# Altium PCB 100068622-001_Rev1.PcbDoc (part 1 of 2)
Units mm, origin at the board's own origin, x right, y up, seen from the top; angles counter-clockwise.
Board outline 61.34 x 21.34 mm, 4 copper layers (F.Cu, In1.Cu, In2.Cu, B.Cu); 96 components, 54 nets, 231 pads, 172 vias.
Unrouted connection lines stored in the file: 5.
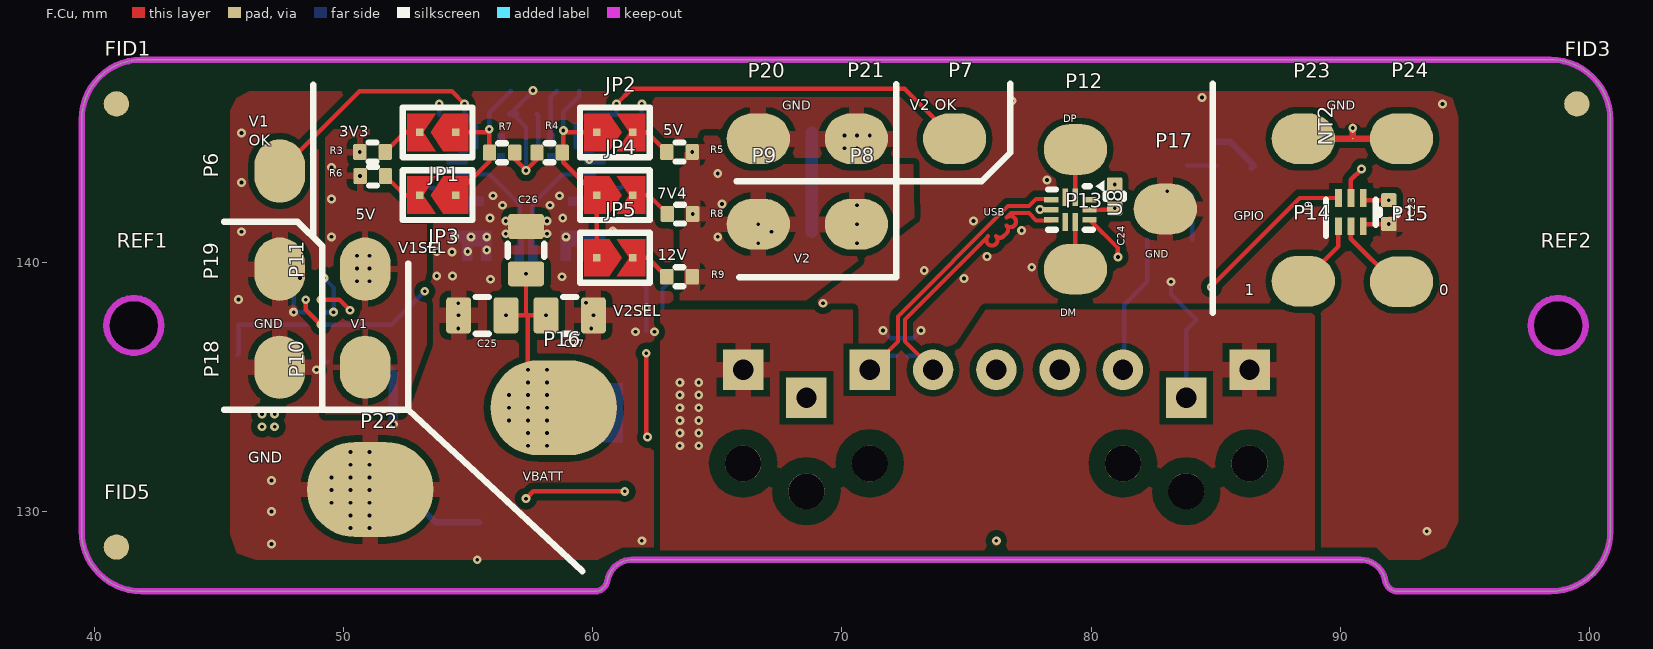
[diagram p0: F.Cu view]
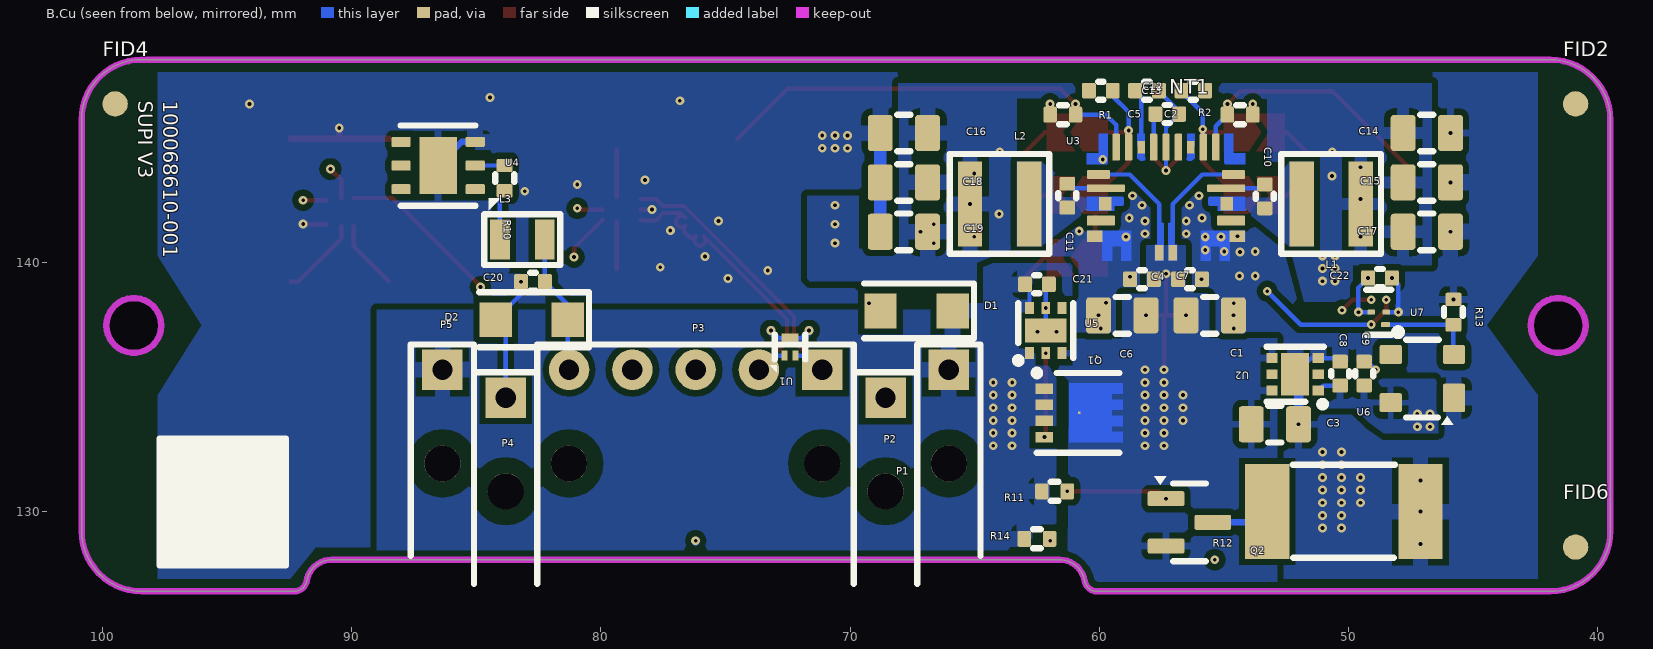
[diagram p1: B.Cu view, seen from below]
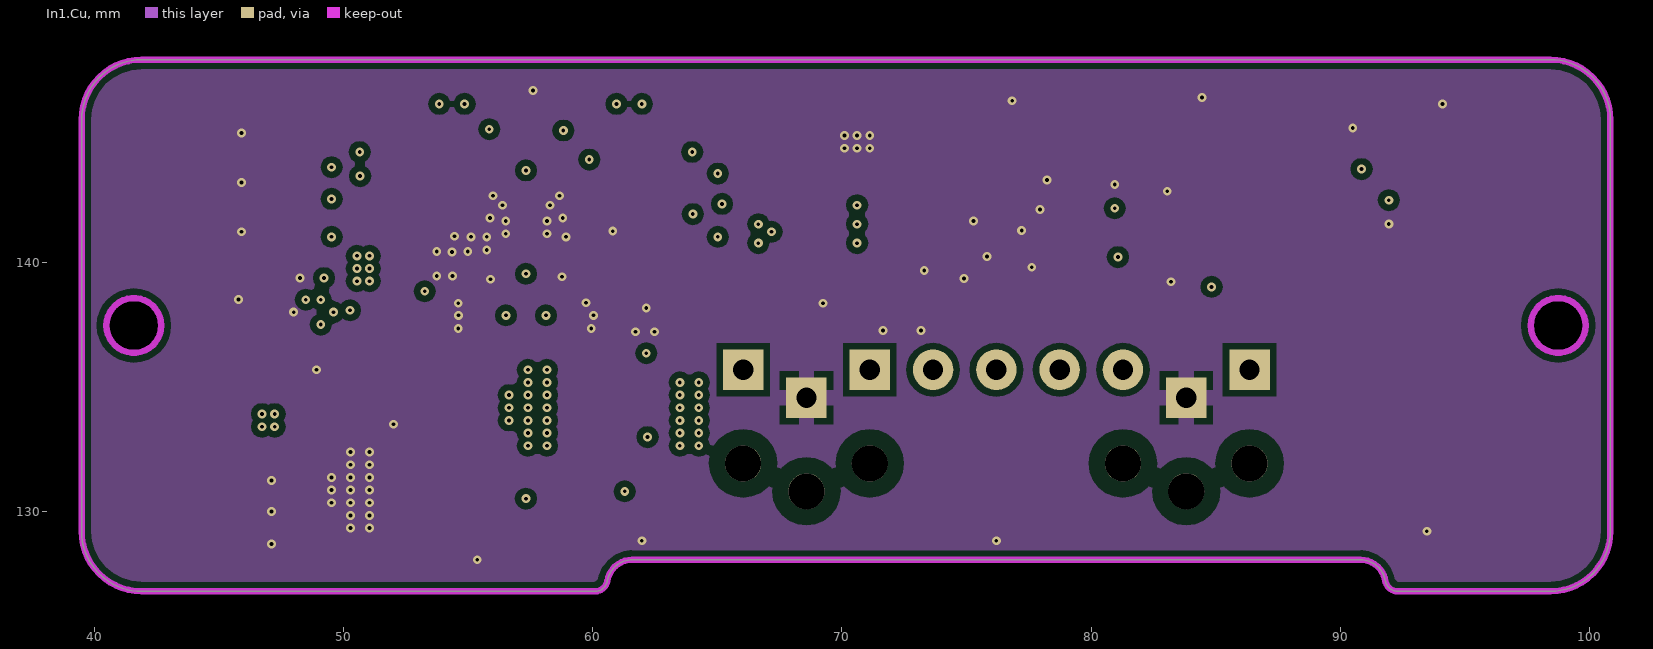
[diagram p2: In1.Cu]
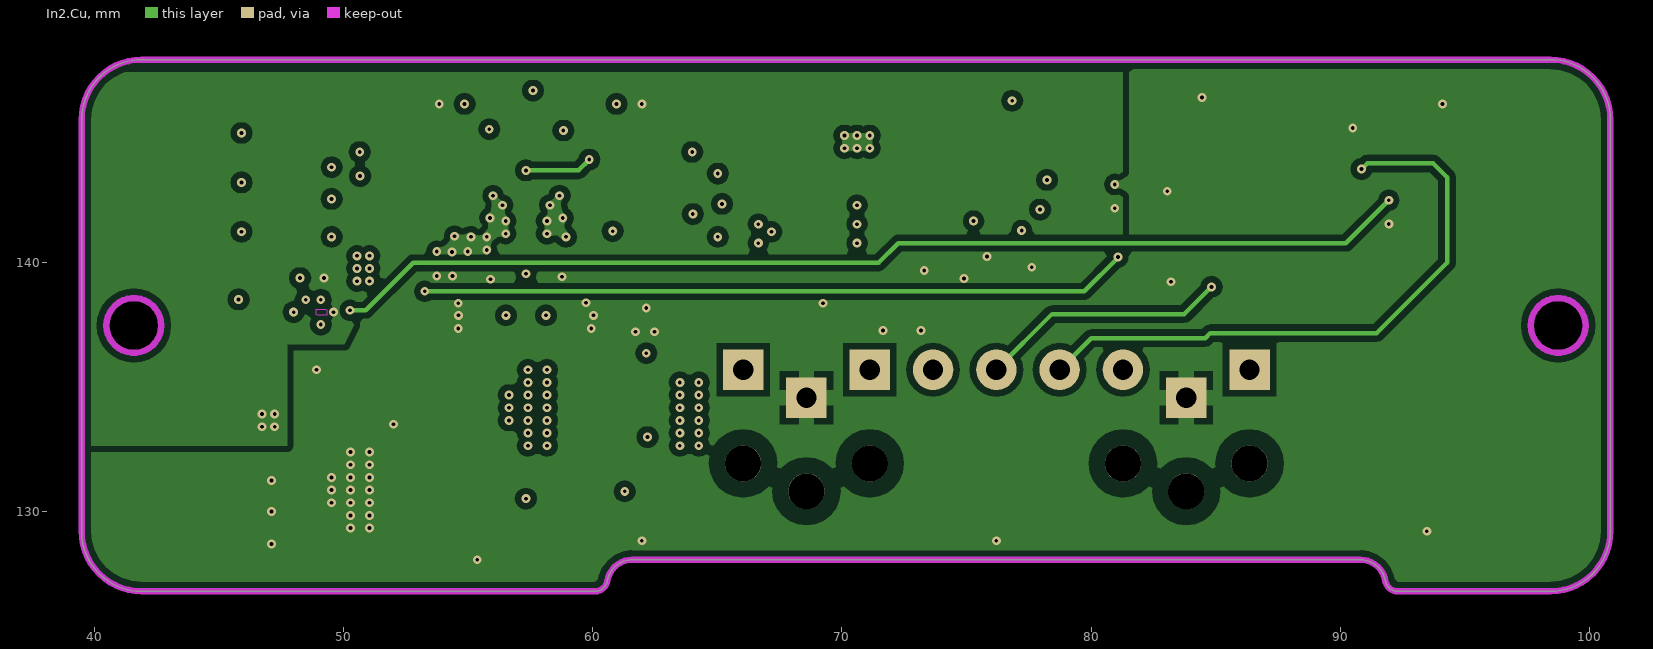
[diagram p3: In2.Cu]

## Layer stack, top to bottom
F.Mask: solder mask 0.0102, Solder Resist, Dk 3.5
F.Cu: signal copper 0.0356
Dielectric 1: dielectric 0.32, FR-4, Dk 4.8
In1.Cu: signal copper 0.0356
Dielectric2: dielectric 0.32, FR-4, Dk 4.8
In2.Cu: signal copper 0.0356
Dielectric3: dielectric 0.32, FR-4, Dk 4.8
B.Cu: signal copper 0.0356
B.Mask: solder mask 0.0102, Solder Resist, Dk 3.5

## Board outline
91.807,127.22 ccw(c92.308,127.305) 92.308,126.797 98.43,126.797 ccw(c98.425,129.21) 100.838,129.21 100.838,145.72 ccw(c98.425,145.72) 98.425,148.133 41.91,148.133 ccw(c41.91,145.72) 39.497,145.72 39.497,129.21 ccw(c41.91,129.21) 41.91,126.797 60.097,126.797 ccw(c60.092,127.305) 60.593,127.22 cw(c61.595,127.051) 60.715,127.559 cw(c61.595,127.051) 61.595,128.067 90.805,128.067 cw(c90.805,127.051) 91.685,127.559 cw(c90.805,127.051) 91.807,127.22
cut-out: 42.702,137.465 42.664,137.752 42.553,138.02 42.377,138.249 42.147,138.426 41.88,138.536 41.593,138.574 41.305,138.536 41.038,138.426 40.808,138.249 40.632,138.02 40.521,137.752 40.483,137.465 40.521,137.178 40.632,136.91 40.808,136.68 41.038,136.504 41.305,136.393 41.593,136.355 41.88,136.393 42.147,136.504 42.377,136.68 42.553,136.91 42.664,137.178 42.702,137.465
cut-out: 99.852,137.465 99.814,137.752 99.703,138.02 99.527,138.249 99.297,138.426 99.03,138.536 98.742,138.574 98.455,138.536 98.188,138.426 97.958,138.249 97.782,138.02 97.671,137.752 97.633,137.465 97.671,137.178 97.782,136.91 97.958,136.68 98.188,136.504 98.455,136.393 98.742,136.355 99.03,136.393 99.297,136.504 99.527,136.68 99.703,136.91 99.814,137.178 99.852,137.465

## Design rules (kind name [scope] priority, off if disabled: settings)
Clearance "Clearence 0.635_PadClass" [InPadClass('Pad Class Clearance 0.635')] p1: gap=0.635 ignorepadtopadclearanceinfootprint=FALSE
Clearance "Clearence 0.254_Polygon" [InNamedPolygon('F.Cu-/Block Diagram/VOUT2') OR InNamedPolygon('F.Cu-/Block Diagram/VOUT1') OR InNamedPolygon('F.Cu-GND') OR InNamedPolygon('F.Cu-GND-1') OR InNamedPolygon('F.Cu-/Block Diagram/VBATT') OR InNamedPolygon('In1.Cu-GND') OR InNamedPolygon('In2.Cu-GND') OR InNamedPolygon('In2.Cu-/Block Diagram/Power Supplies/P3V3_AUX') OR InNamedPolygon('B.Cu-Net-(U3-LX1)') OR InNamedPolygon('B.Cu-VBATT_PROT') OR InNamedPolygon('B.Cu-/Block Diagram/VBATT') OR InNamedPolygon('B.Cu-/Block Diagram/VOUT2') OR InNamedPolygon('B.Cu-/Block Diagram/Power Supplies/P3V3_AUX') OR InNamedPolygon('B.Cu-/Block Diagram/VOUT1') OR InNamedPolygon('B.Cu-GND') OR InNamedPolygon('B.Cu-Net-(U3-LX2)')] p2: gap=0.254 ignorepadtopadclearanceinfootprint=FALSE
Clearance "Clearence 0.254_PadClass" [InPadClass('Pad Class Clearance 0.254')] p3: gap=0.254 ignorepadtopadclearanceinfootprint=FALSE
Clearance "Clearence 0.1778_PadClass" [InPadClass('Pad Class Clearance 0.1778')] p4: gap=0.178 ignorepadtopadclearanceinfootprint=FALSE
Clearance "Clearence 0.1524_PadClass" [InPadClass('Pad Class Clearance 0.1524')] p5: gap=0.152 ignorepadtopadclearanceinfootprint=FALSE
Clearance "Clearence 0.14_PadClass" [InPadClass('Pad Class Clearance 0.14')] p6: gap=0.14 ignorepadtopadclearanceinfootprint=FALSE
Clearance "Clearence 0.0254_PadClass" [InPadClass('Pad Class Clearance 0.0254')] p7: gap=0.025 ignorepadtopadclearanceinfootprint=FALSE
MinimumSolderMaskSliver [All] p1: minsoldermaskwidth=0
PolygonConnect Polygon_B.Cu-Net-(U3-LX2)_ConnectDirect [IsNamedPolygon('B.Cu-Net-(U3-LX2)')] p1: connectstyle=Direct reliefconductorwidth=0.254 reliefentries=4 polygonreliefangle="90 Angle" airgapwidth=0.254
PolygonConnect Polygon_B.Cu-GND_ConnectDirect [IsNamedPolygon('B.Cu-GND') vs IsVia] p2: connectstyle=Direct reliefconductorwidth=0.254 reliefentries=4 polygonreliefangle="90 Angle" airgapwidth=0.254
PolygonConnect Polygon_B.Cu-GND_ConnectRelief45 [IsNamedPolygon('B.Cu-GND') vs (IsThruPin or IsSMTPin) and (PadShape_AllLayers = 'Round')] p3: connectstyle=Relief reliefconductorwidth=0.635 reliefentries=4 polygonreliefangle="45 Angle" airgapwidth=0.254
PolygonConnect Polygon_B.Cu-GND_ConnectRelief90 [IsNamedPolygon('B.Cu-GND') vs (IsThruPin or IsSMTPin) and (PadShape_AllLayers <> 'Round')] p4: connectstyle=Relief reliefconductorwidth=0.635 reliefentries=4 polygonreliefangle="90 Angle" airgapwidth=0.254
PolygonConnect "Polygon_B.Cu-/Block Diagram/VOUT1_ConnectDirect" [IsNamedPolygon('B.Cu-/Block Diagram/VOUT1') vs IsVia] p5: connectstyle=Direct reliefconductorwidth=0.254 reliefentries=4 polygonreliefangle="90 Angle" airgapwidth=0.254
PolygonConnect "Polygon_B.Cu-/Block Diagram/VOUT1_ConnectRelief45" [IsNamedPolygon('B.Cu-/Block Diagram/VOUT1') vs (IsThruPin or IsSMTPin) and (PadShape_AllLayers = 'Round')] p6: connectstyle=Relief reliefconductorwidth=0.508 reliefentries=4 polygonreliefangle="45 Angle" airgapwidth=0.254
PolygonConnect "Polygon_B.Cu-/Block Diagram/VOUT1_ConnectRelief90" [IsNamedPolygon('B.Cu-/Block Diagram/VOUT1') vs (IsThruPin or IsSMTPin) and (PadShape_AllLayers <> 'Round')] p7: connectstyle=Relief reliefconductorwidth=0.508 reliefentries=4 polygonreliefangle="90 Angle" airgapwidth=0.254
PolygonConnect "Polygon_B.Cu-/Block Diagram/Power Supplies/P3V3_AUX_ConnectDirect" [IsNamedPolygon('B.Cu-/Block Diagram/Power Supplies/P3V3_AUX') vs IsVia] p8: connectstyle=Direct reliefconductorwidth=0.254 reliefentries=4 polygonreliefangle="90 Angle" airgapwidth=0.254
PolygonConnect "Polygon_B.Cu-/Block Diagram/Power Supplies/P3V3_AUX_ConnectRelief45" [IsNamedPolygon('B.Cu-/Block Diagram/Power Supplies/P3V3_AUX') vs (IsThruPin or IsSMTPin) and (PadShape_AllLayers = 'Round')] p9: connectstyle=Relief reliefconductorwidth=0.254 reliefentries=4 polygonreliefangle="45 Angle" airgapwidth=0.254
PolygonConnect "Polygon_B.Cu-/Block Diagram/Power Supplies/P3V3_AUX_ConnectRelief90" [IsNamedPolygon('B.Cu-/Block Diagram/Power Supplies/P3V3_AUX') vs (IsThruPin or IsSMTPin) and (PadShape_AllLayers <> 'Round')] p10: connectstyle=Relief reliefconductorwidth=0.254 reliefentries=4 polygonreliefangle="90 Angle" airgapwidth=0.254
PolygonConnect "Polygon_B.Cu-/Block Diagram/VOUT2_ConnectDirect" [IsNamedPolygon('B.Cu-/Block Diagram/VOUT2') vs IsVia] p11: connectstyle=Direct reliefconductorwidth=0.254 reliefentries=4 polygonreliefangle="90 Angle" airgapwidth=0.254
PolygonConnect "Polygon_B.Cu-/Block Diagram/VOUT2_ConnectRelief45" [IsNamedPolygon('B.Cu-/Block Diagram/VOUT2') vs (IsThruPin or IsSMTPin) and (PadShape_AllLayers = 'Round')] p12: connectstyle=Relief reliefconductorwidth=0.635 reliefentries=4 polygonreliefangle="45 Angle" airgapwidth=0.254
PolygonConnect "Polygon_B.Cu-/Block Diagram/VOUT2_ConnectRelief90" [IsNamedPolygon('B.Cu-/Block Diagram/VOUT2') vs (IsThruPin or IsSMTPin) and (PadShape_AllLayers <> 'Round')] p13: connectstyle=Relief reliefconductorwidth=0.635 reliefentries=4 polygonreliefangle="90 Angle" airgapwidth=0.254
PolygonConnect "Polygon_B.Cu-/Block Diagram/VBATT_ConnectDirect" [IsNamedPolygon('B.Cu-/Block Diagram/VBATT') vs IsVia] p14: connectstyle=Direct reliefconductorwidth=0.254 reliefentries=4 polygonreliefangle="90 Angle" airgapwidth=0.254
PolygonConnect "Polygon_B.Cu-/Block Diagram/VBATT_ConnectRelief45" [IsNamedPolygon('B.Cu-/Block Diagram/VBATT') vs (IsThruPin or IsSMTPin) and (PadShape_AllLayers = 'Round')] p15: connectstyle=Relief reliefconductorwidth=0.635 reliefentries=4 polygonreliefangle="45 Angle" airgapwidth=0.254
PolygonConnect "Polygon_B.Cu-/Block Diagram/VBATT_ConnectRelief90" [IsNamedPolygon('B.Cu-/Block Diagram/VBATT') vs (IsThruPin or IsSMTPin) and (PadShape_AllLayers <> 'Round')] p16: connectstyle=Relief reliefconductorwidth=0.635 reliefentries=4 polygonreliefangle="90 Angle" airgapwidth=0.254
PolygonConnect Polygon_B.Cu-VBATT_PROT_ConnectDirect [IsNamedPolygon('B.Cu-VBATT_PROT')] p17: connectstyle=Direct reliefconductorwidth=0.254 reliefentries=4 polygonreliefangle="90 Angle" airgapwidth=0.254
PolygonConnect Polygon_B.Cu-Net-(U3-LX1)_ConnectDirect [IsNamedPolygon('B.Cu-Net-(U3-LX1)')] p18: connectstyle=Direct reliefconductorwidth=0.254 reliefentries=4 polygonreliefangle="90 Angle" airgapwidth=0.254
PolygonConnect "Polygon_In2.Cu-/Block Diagram/Power Supplies/P3V3_AUX_ConnectDirect" [IsNamedPolygon('In2.Cu-/Block Diagram/Power Supplies/P3V3_AUX') vs IsVia] p19: connectstyle=Direct reliefconductorwidth=0.254 reliefentries=4 polygonreliefangle="90 Angle" airgapwidth=0.254
PolygonConnect "Polygon_In2.Cu-/Block Diagram/Power Supplies/P3V3_AUX_ConnectRelief45" [IsNamedPolygon('In2.Cu-/Block Diagram/Power Supplies/P3V3_AUX') vs (IsThruPin or IsSMTPin) and (PadShape_AllLayers = 'Round')] p20: connectstyle=Relief reliefconductorwidth=0.254 reliefentries=4 polygonreliefangle="45 Angle" airgapwidth=0.254
PolygonConnect "Polygon_In2.Cu-/Block Diagram/Power Supplies/P3V3_AUX_ConnectRelief90" [IsNamedPolygon('In2.Cu-/Block Diagram/Power Supplies/P3V3_AUX') vs (IsThruPin or IsSMTPin) and (PadShape_AllLayers <> 'Round')] p21: connectstyle=Relief reliefconductorwidth=0.254 reliefentries=4 polygonreliefangle="90 Angle" airgapwidth=0.254
PolygonConnect Polygon_In2.Cu-GND_ConnectDirect [IsNamedPolygon('In2.Cu-GND') vs IsVia] p22: connectstyle=Direct reliefconductorwidth=0.254 reliefentries=4 polygonreliefangle="90 Angle" airgapwidth=0.254
PolygonConnect Polygon_In2.Cu-GND_ConnectRelief45 [IsNamedPolygon('In2.Cu-GND') vs (IsThruPin or IsSMTPin) and (PadShape_AllLayers = 'Round')] p23: connectstyle=Relief reliefconductorwidth=0.635 reliefentries=4 polygonreliefangle="45 Angle" airgapwidth=0.254
PolygonConnect Polygon_In2.Cu-GND_ConnectRelief90 [IsNamedPolygon('In2.Cu-GND') vs (IsThruPin or IsSMTPin) and (PadShape_AllLayers <> 'Round')] p24: connectstyle=Relief reliefconductorwidth=0.635 reliefentries=4 polygonreliefangle="90 Angle" airgapwidth=0.254
PolygonConnect Polygon_In1.Cu-GND_ConnectDirect [IsNamedPolygon('In1.Cu-GND') vs IsVia] p25: connectstyle=Direct reliefconductorwidth=0.254 reliefentries=4 polygonreliefangle="90 Angle" airgapwidth=0.254
PolygonConnect Polygon_In1.Cu-GND_ConnectRelief45 [IsNamedPolygon('In1.Cu-GND') vs (IsThruPin or IsSMTPin) and (PadShape_AllLayers = 'Round')] p26: connectstyle=Relief reliefconductorwidth=0.635 reliefentries=4 polygonreliefangle="45 Angle" airgapwidth=0.254
PolygonConnect Polygon_In1.Cu-GND_ConnectRelief90 [IsNamedPolygon('In1.Cu-GND') vs (IsThruPin or IsSMTPin) and (PadShape_AllLayers <> 'Round')] p27: connectstyle=Relief reliefconductorwidth=0.635 reliefentries=4 polygonreliefangle="90 Angle" airgapwidth=0.254
PolygonConnect "Polygon_F.Cu-/Block Diagram/VBATT_ConnectDirect" [IsNamedPolygon('F.Cu-/Block Diagram/VBATT') vs IsVia] p28: connectstyle=Direct reliefconductorwidth=0.254 reliefentries=4 polygonreliefangle="90 Angle" airgapwidth=0.254
PolygonConnect "Polygon_F.Cu-/Block Diagram/VBATT_ConnectRelief45" [IsNamedPolygon('F.Cu-/Block Diagram/VBATT') vs (IsThruPin or IsSMTPin) and (PadShape_AllLayers = 'Round')] p29: connectstyle=Relief reliefconductorwidth=0.635 reliefentries=4 polygonreliefangle="45 Angle" airgapwidth=0.254
PolygonConnect "Polygon_F.Cu-/Block Diagram/VBATT_ConnectRelief90" [IsNamedPolygon('F.Cu-/Block Diagram/VBATT') vs (IsThruPin or IsSMTPin) and (PadShape_AllLayers <> 'Round')] p30: connectstyle=Relief reliefconductorwidth=0.635 reliefentries=4 polygonreliefangle="90 Angle" airgapwidth=0.254
PolygonConnect Polygon_F.Cu-GND-1_ConnectDirect [IsNamedPolygon('F.Cu-GND-1') vs IsVia] p31: connectstyle=Direct reliefconductorwidth=0.254 reliefentries=4 polygonreliefangle="90 Angle" airgapwidth=0.254
PolygonConnect Polygon_F.Cu-GND-1_ConnectRelief45 [IsNamedPolygon('F.Cu-GND-1') vs (IsThruPin or IsSMTPin) and (PadShape_AllLayers = 'Round')] p32: connectstyle=Relief reliefconductorwidth=0.635 reliefentries=4 polygonreliefangle="45 Angle" airgapwidth=0.254
PolygonConnect Polygon_F.Cu-GND-1_ConnectRelief90 [IsNamedPolygon('F.Cu-GND-1') vs (IsThruPin or IsSMTPin) and (PadShape_AllLayers <> 'Round')] p33: connectstyle=Relief reliefconductorwidth=0.635 reliefentries=4 polygonreliefangle="90 Angle" airgapwidth=0.254
PolygonConnect Polygon_F.Cu-GND_ConnectDirect [IsNamedPolygon('F.Cu-GND') vs IsVia] p34: connectstyle=Direct reliefconductorwidth=0.254 reliefentries=4 polygonreliefangle="90 Angle" airgapwidth=0.254
PolygonConnect Polygon_F.Cu-GND_ConnectRelief45 [IsNamedPolygon('F.Cu-GND') vs (IsThruPin or IsSMTPin) and (PadShape_AllLayers = 'Round')] p35: connectstyle=Relief reliefconductorwidth=0.635 reliefentries=4 polygonreliefangle="45 Angle" airgapwidth=0.254
PolygonConnect Polygon_F.Cu-GND_ConnectRelief90 [IsNamedPolygon('F.Cu-GND') vs (IsThruPin or IsSMTPin) and (PadShape_AllLayers <> 'Round')] p36: connectstyle=Relief reliefconductorwidth=0.635 reliefentries=4 polygonreliefangle="90 Angle" airgapwidth=0.254
PolygonConnect "Polygon_F.Cu-/Block Diagram/VOUT1_ConnectDirect" [IsNamedPolygon('F.Cu-/Block Diagram/VOUT1') vs IsVia] p37: connectstyle=Direct reliefconductorwidth=0.254 reliefentries=4 polygonreliefangle="90 Angle" airgapwidth=0.254
PolygonConnect "Polygon_F.Cu-/Block Diagram/VOUT1_ConnectRelief45" [IsNamedPolygon('F.Cu-/Block Diagram/VOUT1') vs (IsThruPin or IsSMTPin) and (PadShape_AllLayers = 'Round')] p38: connectstyle=Relief reliefconductorwidth=0.254 reliefentries=4 polygonreliefangle="45 Angle" airgapwidth=0.254
PolygonConnect "Polygon_F.Cu-/Block Diagram/VOUT1_ConnectRelief90" [IsNamedPolygon('F.Cu-/Block Diagram/VOUT1') vs (IsThruPin or IsSMTPin) and (PadShape_AllLayers <> 'Round')] p39: connectstyle=Relief reliefconductorwidth=0.254 reliefentries=4 polygonreliefangle="90 Angle" airgapwidth=0.254
PolygonConnect "Polygon_F.Cu-/Block Diagram/VOUT2_ConnectDirect" [IsNamedPolygon('F.Cu-/Block Diagram/VOUT2') vs IsVia] p40: connectstyle=Direct reliefconductorwidth=0.254 reliefentries=4 polygonreliefangle="90 Angle" airgapwidth=0.254
PolygonConnect "Polygon_F.Cu-/Block Diagram/VOUT2_ConnectRelief45" [IsNamedPolygon('F.Cu-/Block Diagram/VOUT2') vs (IsThruPin or IsSMTPin) and (PadShape_AllLayers = 'Round')] p41: connectstyle=Relief reliefconductorwidth=0.635 reliefentries=4 polygonreliefangle="45 Angle" airgapwidth=0.254
PolygonConnect "Polygon_F.Cu-/Block Diagram/VOUT2_ConnectRelief90" [IsNamedPolygon('F.Cu-/Block Diagram/VOUT2') vs (IsThruPin or IsSMTPin) and (PadShape_AllLayers <> 'Round')] p42: connectstyle=Relief reliefconductorwidth=0.635 reliefentries=4 polygonreliefangle="90 Angle" airgapwidth=0.254
RoutingVias [All] p1: holewidth=0.711 width=1.27 viastyle="Through Hole" minholewidth=0.711 minwidth=1.27 maxholewidth=0.711 maxwidth=1.27
SilkToSilkClearance [All] p1: silktosilkclearance=0
SilkToSolderMaskClearance [IsPad] p1: minsilkscreentomaskgap=0 clearancetoexposedcopper=TRUE
SolderMaskExpansion [All] p1: expansion=0.102 istentingtop=FALSE
Width [All] p1: maxlimit=10 minlimit=0.254 preferedwidth=0.254 minimp=50.000000 maximp=50.000000 favimp=50.000000
27 further rules are at their usual default settings.

## Classes and differential pairs
pad class "Pad Class Clearance 0.14": U2-1 U2-2 U2-3 U2-4 U2-5 U2-6 U2-7
pad class "Pad Class Clearance 0.1778": U3-1 U3-2 U3-3 U3-4 U3-5 U3-6 U3-7 U3-8 U3-9 U3-10 U3-11 U3-12 U3-13 U3-14 U3-15 U3-16 U3-17 U3-18 U3-19 U3-20 U3-21 U3-22 U3-23
pad class "Pad Class Clearance 0.635": P1-Un1 P2-Un1 P3-Un1 P3-Un2 P4-Un1 P5-Un1
pad class "Pad Class Clearance 0.1524": U8-1 U8-2 U8-3 U8-4 U8-5 U8-6 U8-7 U8-8 U8-9 U8-10
pad class "Pad Class Clearance 0.0254": NT1-1 NT1-2 NT2-1 NT2-2
pad class "Pad Class Clearance 0.254": FID1-Un1 FID2-Un1 FID3-Un1 FID4-Un1 FID5-Un1 FID6-Un1

## Components (designator, comment, footprint, x,y, rotation, side; value= is the part's Value field where it differs from the comment)
C1 "Comment" C_0805_2012Metric#1 55.575,137.871 r0 bottom value="4.7uF 50V"
C2 "Comment" C_0402_1005Metric#1 58.09,146.888 r0 bottom value="2.2uF 35V"
C3 "Comment" C_0805_2012Metric#1 52.959,133.502 r0 bottom value="10uF 50V"
C4 "Comment" C_0402_1005Metric#1 56.363,139.319 r0 bottom value="0.1uF 50V"
C5 "Comment" C_0402_1005Metric#1 57.277,145.948 r0 bottom value="10uF 6.3V"
C6 "Comment" C_0805_2012Metric#1 59.08,137.871 r180 bottom value="4.7uF 50V"
C7 "Comment" C_0402_1005Metric#1 58.293,139.319 r180 bottom value="0.1uF 50V"
C8 "Comment" C_0402_1005Metric#1 50.343,135.534 r270 bottom value="10000pF 50V"
C9 "Comment" C_0402_1005Metric#1 49.378,135.534 r270 bottom value="10uF 6.3V"
C10 "Comment" C_0402_1005Metric#1 53.365,142.646 r270 bottom value="0.1uF 50V"
C11 "Comment" C_0402_1005Metric#1 61.29,142.672 r270 bottom value="0.1uF 50V"
C12 "Comment" C_0402_1005Metric#1 56.236,146.888 r180 bottom value="10pF 50V"
C13 "Comment" C_0402_1005Metric#1 59.944,146.888 r0 bottom value="10pF 50V"
C14 "Comment" C_0805_2012Metric#1 46.863,145.186 r0 bottom value="22uF 25V"
C15 "Comment" C_0805_2012Metric#1 46.863,143.205 r0 bottom value="22uF 25V"
C16 "Comment" C_0805_2012Metric#1 67.843,145.186 r180 bottom value="22uF 25V"
C17 "Comment" C_0805_2012Metric#1 46.863,141.224 r0 bottom value="22uF 25V"
C18 "Comment" C_0805_2012Metric#1 67.843,143.205 r180 bottom value="22uF 25V"
C19 "Comment" C_0805_2012Metric#1 67.843,141.224 r180 bottom value="22uF 25V"
C20 "Comment" C_0402_1005Metric#1 82.728,139.217 r180 bottom value="4700pF 50V"
C21 "Comment" C_0402_1005Metric#1 62.509,139.116 r0 bottom value="0.1uF 50V"
C22 "Comment" C_0402_1005Metric#1 48.743,139.37 r0 bottom value="0.1uF 50V"
C23 "Comment" C_0402_1005Metric#2 91.948,142.011 r270 top value="0.1uF 50V"
C24 "Comment" C_0402_1005Metric#2 80.95,142.646 r90 top value="0.1uF 50V"
C25 "Comment" C_0805_2012Metric#2 55.575,137.871 r180 top value="22uF 35V"
C26 "Comment" C_0805_2012Metric#2 57.328,140.487 r90 top value="22uF 35V"
C27 "Comment" C_0805_2012Metric#2 59.08,137.871 r0 top value="22uF 35V"
D1 "Comment" SOD-123FL 67.334,138.049 r180 bottom value=26VWM
D2 "Comment" SOD-123FL 82.779,137.693 r180 bottom value=3.3VWM
FID1 "Comment" Fiducial_Cu0.040_Mask0.060 40.894,146.355 r0 top value=Fiducial
FID2 "Comment" Fiducial_Cu0.040_Mask0.060 40.894,146.355 r0 bottom value=Fiducial
FID3 "Comment" Fiducial_Cu0.040_Mask0.060 99.492,146.355 r0 top value=Fiducial
FID4 "Comment" Fiducial_Cu0.040_Mask0.060 99.492,146.355 r0 bottom value=Fiducial
FID5 "Comment" Fiducial_Cu0.040_Mask0.060 40.894,128.575 r0 top value=Fiducial
FID6 "Comment" Fiducial_Cu0.040_Mask0.060 40.894,128.575 r0 bottom value=Fiducial
JP1 "Comment" SolderJumper-2_P1.3mm_Open_TrianglePad1.0x1.5mm 53.783,145.212 r180 top value=Jumper_2_Bridged
JP2 "Comment" SolderJumper-2_P1.3mm_Open_TrianglePad1.0x1.5mm 60.895,145.212 r0 top value=Jumper_2_Bridged
JP3 "Comment" SolderJumper-2_P1.3mm_Open_TrianglePad1.0x1.5mm 53.783,142.697 r180 top value=Jumper_2_Open
JP4 "Comment" SolderJumper-2_P1.3mm_Open_TrianglePad1.0x1.5mm 60.895,142.697 r0 top value=Jumper_2_Open
JP5 "Comment" SolderJumper-2_P1.3mm_Open_TrianglePad1.0x1.5mm 60.895,140.183 r0 top value=Jumper_2_Open
L1 "Comment" XEL4030-3.1mm 50.698,142.342 r0 bottom value=0.47uH
L2 "Comment" XEL4030-3.1mm 64.008,142.342 r180 bottom value=0.47uH
L3 "Comment" "0806 SMD" 83.154,140.91 r180 bottom value="27 OHM @2MHZ"
NT1 "Comment" "NetTie segment - 10 mils horizontal"#1 56.82,145.948 r0 bottom value=NetTie_2
NT2 "Comment" "NetTie segment - 10 mils horizontal"#2 90.5,145.085 r90 top value=NetTie_2
P1 "Comment" 829-22-001-20-001101 66.04,135.687 r180 bottom value=~
P2 "Comment" 829-22-001-20-002101 68.58,134.569 r180 bottom value=~
P3 "Comment" 829-22-005-20-001101 76.2,135.687 r180 bottom value=~
P4 "Comment" 829-22-001-20-002101 83.82,134.569 r180 bottom value=~
P5 "Comment" 829-22-001-20-001101 86.36,135.687 r180 bottom value=~
P6 "Comment" Hand_Solder_Pad_100x80_mil 47.447,143.662 r90 top value=~
P7 "Comment" Hand_Solder_Pad_100x80_mil 74.524,144.958 r0 top value=~
P8 "Comment" Hand_Solder_Pad_100x80_mil 70.587,141.529 r0 top value=~
P9 "Comment" Hand_Solder_Pad_100x80_mil 66.65,141.529 r0 top value=~
P10 "Comment" Hand_Solder_Pad_100x80_mil 50.876,135.788 r90 top value=~
P11 "Comment" Hand_Solder_Pad_100x80_mil 50.876,139.725 r90 top value=~
P12 "Comment" Hand_Solder_Pad_100x80_mil 79.375,144.526 r0 top value=~
P13 "Comment" Hand_Solder_Pad_100x80_mil 79.375,139.725 r0 top value=~
P14 "Comment" Hand_Solder_Pad_100x80_mil 88.519,139.243 r0 top value=~
P15 "Comment" Hand_Solder_Pad_100x80_mil 92.456,139.217 r0 top value=~
P16 "Comment" Hand_Solder_Pad_200x150_mil 58.445,134.163 r0 top value=~
P17 "Comment" Hand_Solder_Pad_100x80_mil 82.982,142.138 r0 top value=~
P18 "Comment" Hand_Solder_Pad_100x80_mil 47.447,135.788 r90 top value=~
P19 "Comment" Hand_Solder_Pad_100x80_mil 47.447,139.725 r90 top value=~
P20 "Comment" Hand_Solder_Pad_100x80_mil 66.65,144.958 r0 top value=~
P21 "Comment" Hand_Solder_Pad_100x80_mil 70.587,144.958 r0 top value=~
P22 "Comment" Hand_Solder_Pad_200x150_mil 51.079,130.886 r0 top value=~
P23 "Comment" Hand_Solder_Pad_100x80_mil 88.519,144.958 r0 top value=~
P24 "Comment" Hand_Solder_Pad_100x80_mil 92.456,144.958 r0 top value=~
Q1 "Comment" WDFN8_3.3_x_3.3_0.65mm_p 60.808,133.96 r90 bottom value=NTTFS2D1N04HL
Q2 "Comment" SOT-23 56.388,129.565 r0 bottom value=~
R1 "Comment" R_0402_1005Metric#1 61.468,145.923 r180 bottom value="100K 1% 0.1W"
R2 "Comment" R_0402_1005Metric#1 54.356,145.923 r180 bottom value="100K 1% 0.1W"
R3 "Comment" R_0402_1005Metric#2 51.167,144.424 r0 top value="34.4K 0.1% 1/16W"
R4 "Comment" R_0402_1005Metric#2 58.279,144.399 r180 top value="11K 1% 0.1W"
R5 "Comment" R_0402_1005Metric#2 63.486,144.424 r180 top value="57.6K 1% 0.1W"
R6 "Comment" R_0402_1005Metric#2 51.181,143.459 r0 top value="57.6K 1% 0.1W"
R7 "Comment" R_0402_1005Metric#2 56.374,144.399 r0 top value="11K 1% 0.1W"
R8 "Comment" R_0402_1005Metric#2 63.512,141.935 r180 top value="90.9K 1% 0.1W"
R9 "Comment" R_0402_1005Metric#2 63.486,139.421 r180 top value="154K 1% 0.1W"
R10 "Comment" R_0402_1005Metric#1 83.865,143.374 r90 bottom value="100 1% 0.1W"
R11 "Comment" R_0402_1005Metric#1 61.798,130.81 r0 bottom value="100 1% 0.1W"
R12 "Comment" R_2512_HandSoldering 50.19,129.997 r180 bottom value=1.00k
R13 "Comment" R_0402_1005Metric#1 45.796,137.998 r270 bottom value="100K 1% 0.1W"
R14 "Comment" R_0402_1005Metric#1 62.509,128.905 r0 bottom value="100K 1% 0.1W"
REF1 "Comment" MountingHole_2.2mm_M2 41.593,137.465 r0 top value=MountingHole_2.2mm_M2
REF2 "Comment" MountingHole_2.2mm_M2 98.742,137.465 r0 top value=MountingHole_2.2mm_M2
U1 "Comment" Diodes_DFN1006-3 72.415,136.601 r270 bottom value=~
U2 "Comment" WDFN6_2x2_0.65p_1.72x1.12mm_EP 52.146,135.508 r270 bottom value=~
U3 "Comment" F234A5FY+1 57.328,142.621 r0 bottom value=MAX25254AFDE/VY+
U4 "Comment" Maxim_TDFN-6-1EP_3x3mm_P0.95mm_EP1.5x2.3mm 86.532,143.882 r180 bottom value=DS2431Q+
U5 "Comment" WDFNW6_2x2_0.65p_EP 62.154,137.262 r0 bottom value=NCV68261
U6 "Comment" "SOT-143 Maxim" 47.041,135.331 r180 bottom value=~
U7 "Comment" "QFN-6_1.4x1mm_P0.5mm TI DRY6" 48.793,137.998 r180 bottom value=SN74AUP2G04DRYR
U8 "Comment" "Toshiba UQFN-10_1.4x1.8mm_P0.4mm" 79.172,142.113 r270 top value=~
U9 "Comment" FC2QFN-6 90.424,142.011 r90 top value=~

## Footprints (in the part's own frame and the unit in brackets; to place one, negate y for a bottom-side part, rotate by r counter-clockwise, add the part's x,y. Pads: shape width x height; smd on the part's side, far side on the other; paste and mask are expansions set on the pad)
"0806 SMD" [mm]
  rect 0.8x1.6 smd mask+0.051: 1(0.9,0) 2(-0.9,0)
  silkscreen extent -1.52,-1.02 1.52,1.02
829-22-001-20-001101 [mil]
  rect 64x64 hole 32 paste-99999 mask+2: 1(0,0)
  round 57 hole 57 paste-99999 mask+20: Un1(0,-148)
  silkscreen extent -50,-294 50,40
829-22-001-20-002101 [mil]
  rect 64x64 hole 32 paste-99999 mask+2: 1(0,0)
  round 57 hole 57 paste-99999 mask+20: Un1(0,-148)
  silkscreen extent -50,-294 50,40
829-22-005-20-001101 [mil]
  rect 64x64 hole 32 paste-99999 mask+1: 1(200,0)
  round 64 hole 32 paste-99999 mask+2: 2(100,0) 3(0,0) 4(-100,0) 5(-200,0)
  round 57 hole 57 paste-99999 mask+20: Un1(200,-148) Un2(-200,-148)
  silkscreen extent -250,-294 250,40
C_0402_1005Metric#1 [mm]
  rrect25% 0.56x0.62 smd mask+0.051: 1(0.48,0) 2(-0.48,0)
  silkscreen extent -0.11,-0.36 0.11,0.36
C_0402_1005Metric#2 [mm]
  rrect25% 0.56x0.62 smd mask+0.051: 1(-0.48,0) 2(0.48,0)
  silkscreen extent -0.11,-0.36 0.11,0.36
C_0805_2012Metric#1 [mm]
  rrect25% 1x1.45 smd mask+0.051: 1(0.95,0) 2(-0.95,0)
  silkscreen extent -0.26,-0.73 0.26,0.73
C_0805_2012Metric#2 [mm]
  rrect25% 1x1.45 smd mask+0.051: 1(-0.95,0) 2(0.95,0)
  silkscreen extent -0.26,-0.73 0.26,0.73
Diodes_DFN1006-3 [mm]
  rect 0.4x0.25 smd mask+0.051: 1(0.35,-0.225)
  rect 0.4x0.25 smd mask+0.025: 2(0.35,0.225)
  rect 0.4x0.7 smd mask+0.051: 3(-0.35,0)
  silkscreen extent -0.5,-0.82 1.02,0.61
F234A5FY+1 [mm]
  rrect21% 0.925x0.35 smd mask+0.051: 2(2.712,-0.9) 13(-2.712,-0.9)
  rrect21% 1.525x0.3 smd mask+0.051: 3(2.412,-0.35) 12(-2.412,-0.35)
  rect 0.5x0.55 smd mask+0.051: 4(2.438,0.275) 11(-2.438,0.275)
  rrect21% 1.125x0.4 smd mask+0.051: 5(2.612,0.95) 10(-2.612,0.95)
  rect 0.62x0.45 smd mask+0.051: 6(2.865,1.575) 9(-2.865,1.575)
  rect 0.35x0.625 smd mask+0.051: 7(0.275,2.238) 8(-0.275,2.238)
  rrect25% 0.3x1.075 smd mask+0.051: 15(-2,-2) 16(-1.5,-2) 18(-0.5,-2) 19(0,-2) 20(0.5,-2) 22(1.5,-2) 23(2,-2)
  rect 0.3x0.5 smd mask+0.051: 17(-1,-2) 21(1,-2)
  F.Cu circle w0.001: c0.925,-1.538 r0.075
  F.Cu circle w0.001: c-0.925,-1.538 r0.075
  F.Cu region: 0.85,-1.537 0.85,-1.75 1.15,-1.75 1.15,-1.559 1.026,-1.463 0.925,-1.463
  F.Cu region: 0.85,-2.538 1.15,-2.538 1.15,-2.038 0.85,-2.038
  F.Cu region: -1.15,-1.559 -1.15,-1.75 -0.85,-1.75 -0.85,-1.537 -0.925,-1.463 -1.026,-1.463
  F.Cu region: -1.15,-2.538 -0.85,-2.538 -0.85,-2.038 -1.15,-2.038
  F.Cu region: -3.17,-1.757 -2.695,-1.757 -2.695,-2.54 -2.345,-2.54 -2.345,-1.352 -2.382,-1.315 -3.17,-1.315
  F.Cu region: -3.175,0.35 -2.075,0.35 -2.075,0.55 -3.175,0.55
  F.Cu region: -3.175,0 -1.737,0 -1.7,0.035 -1.7,0.313 -1.737,0.35 -3.175,0.35
  F.Cu region: -2.555,1.825 -2.58,1.8 -3.175,1.8 -3.175,1.35 -1.41,1.35 -1.385,1.375 -1.385,2.55 -1.795,2.55 -1.795,2 -1.82,1.975 -2.13,1.975 -2.155,2 -2.155,2.55 -2.555,2.55
  F.Cu region: -0.45,1.925 -0.357,1.925 -0.345,1.913 -0.345,1.05 -0.32,1.025 -0.125,1.025 -0.1,1.05 -0.1,2.55 -0.45,2.55
  F.Cu region: 0.1,1.05 0.125,1.025 0.32,1.025 0.345,1.05 0.345,1.913 0.357,1.925 0.45,1.925 0.45,2.55 0.1,2.55
  F.Cu region: 1.385,1.375 1.41,1.35 3.175,1.35 3.175,1.8 2.58,1.8 2.555,1.825 2.555,2.55 2.155,2.55 2.155,2 2.13,1.975 1.82,1.975 1.795,2 1.795,2.55 1.385,2.55
  F.Cu region: 2.075,0.35 3.175,0.35 3.175,0.55 2.075,0.55
  F.Cu region: 1.7,0.313 1.7,0.035 1.737,0 3.175,0 3.175,0.35 1.737,0.35
  F.Cu region: 2.345,-1.352 2.345,-2.54 2.695,-2.54 2.695,-1.757 3.17,-1.757 3.17,-1.315 2.382,-1.315
FC2QFN-6 [mm]
  rect 0.713x0.275 smd mask+0.051: 1(-0.569,0.5) 2(-0.569,0) 3(-0.569,-0.5) 4(0.569,-0.5) 5(0.569,0) 6(0.569,0.5)
  silkscreen extent -0.95,-1 0.5,1
Fiducial_Cu0.040_Mask0.060 [mil]
  round 40 smd mask+10: Un1(0,0)
Hand_Solder_Pad_100x80_mil [mil]
  rrect100% 100x80 smd mask+2: 1(0,0)
Hand_Solder_Pad_200x150_mil [mm]
  rrect100% 5.08x3.81 smd mask+0.051: 1(0,0)
Maxim_TDFN-6-1EP_3x3mm_P0.95mm_EP1.5x2.3mm [mm]
  rrect25% 0.775x0.4 smd mask+0.051: 1(1.488,-0.95) 2(1.488,0) 3(1.488,0.95) 4(-1.488,0.95) 5(-1.488,0) 6(-1.488,-0.95)
  rect 1.5x2.3 smd paste-2.3 mask+0.051: 7(0,0)
  rrect25% 0.6x0.93 on Bottom Paste mask-0.93: Un1(0.375,0.575) Un2(0.375,-0.575) Un3(-0.375,0.575) Un4(-0.375,-0.575)
  silkscreen extent -1.5,-1.79 2.51,1.61
MountingHole_2.2mm_M2 [mm]
  round 2.2 hole 2.2 paste-2539.97 mask+0.508: Un1(0,0)
"NetTie segment - 10 mils horizontal"#1 [mil]
  round 2 smd paste-2 mask-2: 1(5,0) 2(-5,0)
  F.Cu lines w10: -5,0 5,0
"NetTie segment - 10 mils horizontal"#2 [mil]
  round 2 smd paste-2 mask-2: 1(-5,0) 2(5,0)
  F.Cu lines w10: -5,0 5,0
"QFN-6_1.4x1mm_P0.5mm TI DRY6" [mm]
  rrect25% 0.35x0.2 smd mask+0.051: 1(0.275,-0.5)
  rrect25% 0.3x0.2 smd mask+0.051: 2(0.3,0) 3(0.3,0.5) 4(-0.3,0.5) 5(-0.3,0) 6(-0.3,-0.5)
  silkscreen extent -0.5,-0.96 0.94,0.9
R_0402_1005Metric#1 [mm]
  rrect25% 0.54x0.64 smd mask+0.051: 1(0.51,0) 2(-0.51,0)
  silkscreen extent -0.15,-0.38 0.15,0.38
R_0402_1005Metric#2 [mm]
  rrect25% 0.54x0.64 smd mask+0.051: 1(-0.51,0) 2(0.51,0)
  silkscreen extent -0.15,-0.38 0.15,0.38
R_2512_HandSoldering [mil]
  rect 70x150 smd mask+2: 1(121,0) 2(-121,0)
  silkscreen extent -81,-73 81,74
SOD-123FL [mm]
  rect 1.3x1.4 smd mask+0.051: 1(1.45,0) 2(-1.45,0)
  silkscreen extent -2.1,-1.1 2.3,1.1
SolderJumper-2_P1.3mm_Open_TrianglePad1.0x1.5mm [mm]
  rect 0.3x0.3 smd paste-0.3 mask+0.051: 1(-0.725,0) 2(0.725,0)
  F.Cu region: 1.225,-0.75 0.075,-0.75 0.575,0 0.075,0.75 1.225,0.75
  F.Cu region: 0.275,0 -0.225,-0.75 -1.225,-0.75 -1.225,0.75 -0.225,0.75
  silkscreen extent -1.4,-1 1.4,1
SOT-23 [mm]
  rrect25% 1.475x0.6 smd mask+0.051: 1(0.937,-0.95) 2(0.937,0.95) 3(-0.937,0)
  silkscreen extent -0.65,-1.84 1.4,1.56
"SOT-143 Maxim" [mil]
  rrect17% 35x45 smd mask+2: 1(50,-30.5)
  rrect21% 35x30 smd mask+2: 2(50,38)
  rrect17% 35x30 smd mask+2: 3(-50,38) 4(-50,-38)
  silkscreen extent -26,-72 49,61
"Toshiba UQFN-10_1.4x1.8mm_P0.4mm" [mm]
  rect 0.713x0.225 smd mask+0.025: 1(-0.493,0.2) 2(-0.493,-0.2) 6(0.493,-0.2) 7(0.493,0.2)
  rect 0.225x0.563 smd mask+0.025: 3(-0.4,-0.768) 4(0,-0.768) 5(0.4,-0.768) 8(0.4,0.768) 9(0,0.768) 10(-0.4,0.768)
  silkscreen extent -1.18,-0.9 0.81,1.35
WDFN6_2x2_0.65p_1.72x1.12mm_EP [mm]
  rect 0.4x0.45 smd mask+0.025: 1(0.65,0.925) 2(0,0.925) 3(-0.65,0.925) 4(-0.65,-0.925) 5(0,-0.925) 6(0.65,-0.925)
  rect 1.72x1.12 smd mask+0.025: 7(0,0)
  silkscreen extent -1.1,-1.15 1.34,1.24
WDFN8_3.3_x_3.3_0.65mm_p [mm]
  rect 0.42x0.7 smd mask+0.051: 1(0.975,1.4) 2(0.325,1.4) 3(-0.325,1.4) 4(-0.975,1.4)
  rect 0.1x0.1 smd mask+0.051: 5(0,0)
  F.Cu region: -1.185,-1.75 -0.765,-1.75 -0.765,-1.3 -0.535,-1.3 -0.535,-1.75 -0.115,-1.75 -0.115,-1.3 0.115,-1.3 0.115,-1.75 0.535,-1.75 0.535,-1.3 0.765,-1.3 0.765,-1.75 1.185,-1.75 1.185,0.4 -1.185,0.4
  silkscreen extent -1.6,-1.6 1.74,1.84
WDFNW6_2x2_0.65p_EP [mm]
  rect 0.35x0.48 smd mask+0.051: 1(0.65,0.91) 2(0,0.91) 3(-0.65,0.91) 4(-0.65,-0.91) 5(0,-0.91) 6(0.65,-0.91)
  rect 1.65x0.95 smd mask+0.051: 7(0,0)
  silkscreen extent -1.1,-1.1 1.24,1.34
XEL4030-3.1mm [mm]
  rect 0.98x3.4 smd mask+0.051: 1(1.185,0) 2(-1.185,0)
  silkscreen extent -2,-2 2,2